# EAGLE board tester+adapter (EAGLE 6.4)
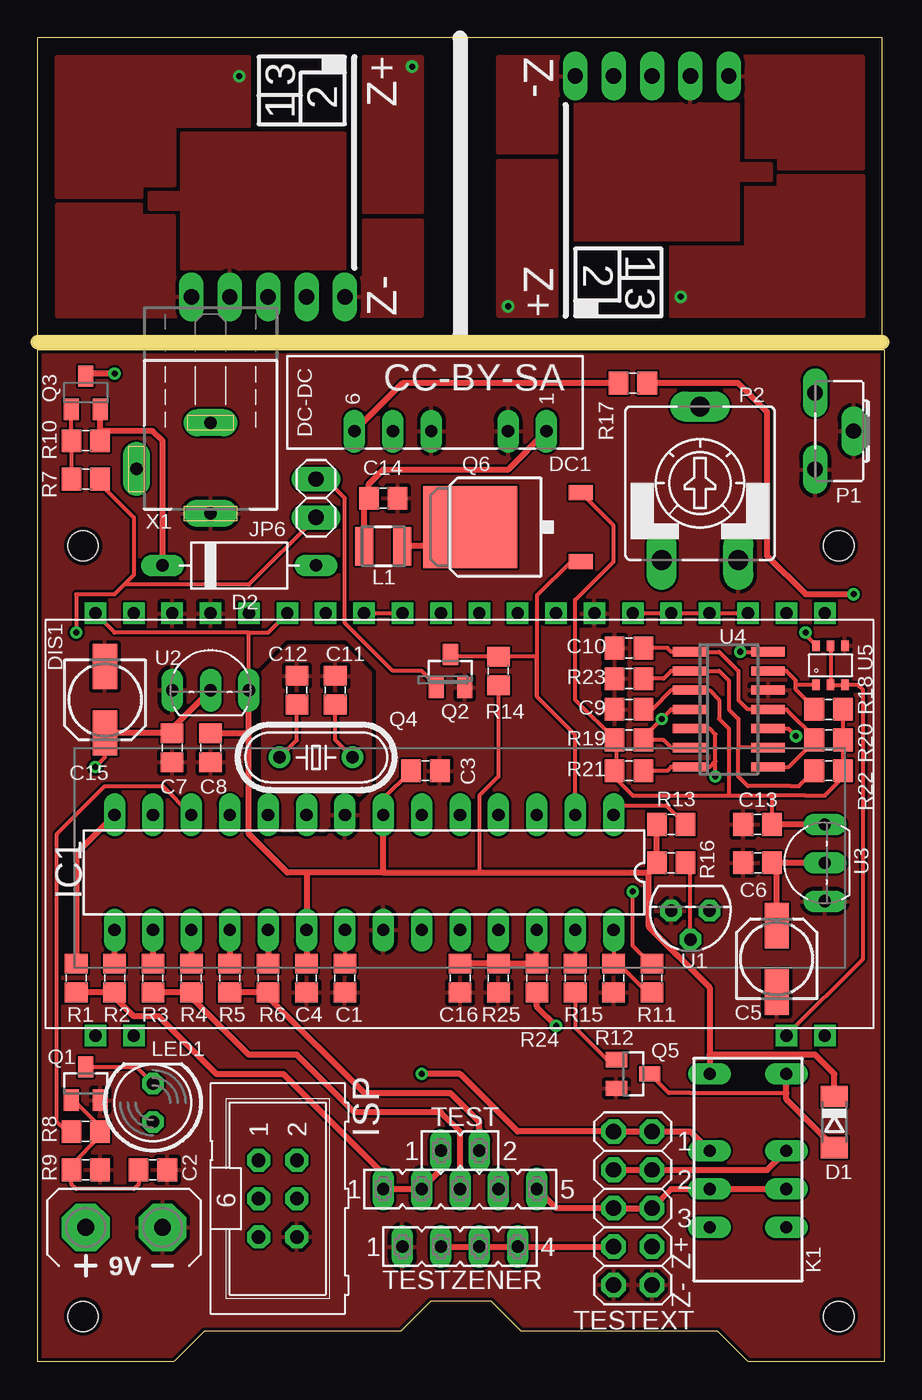
[diagram p0: board, top side]
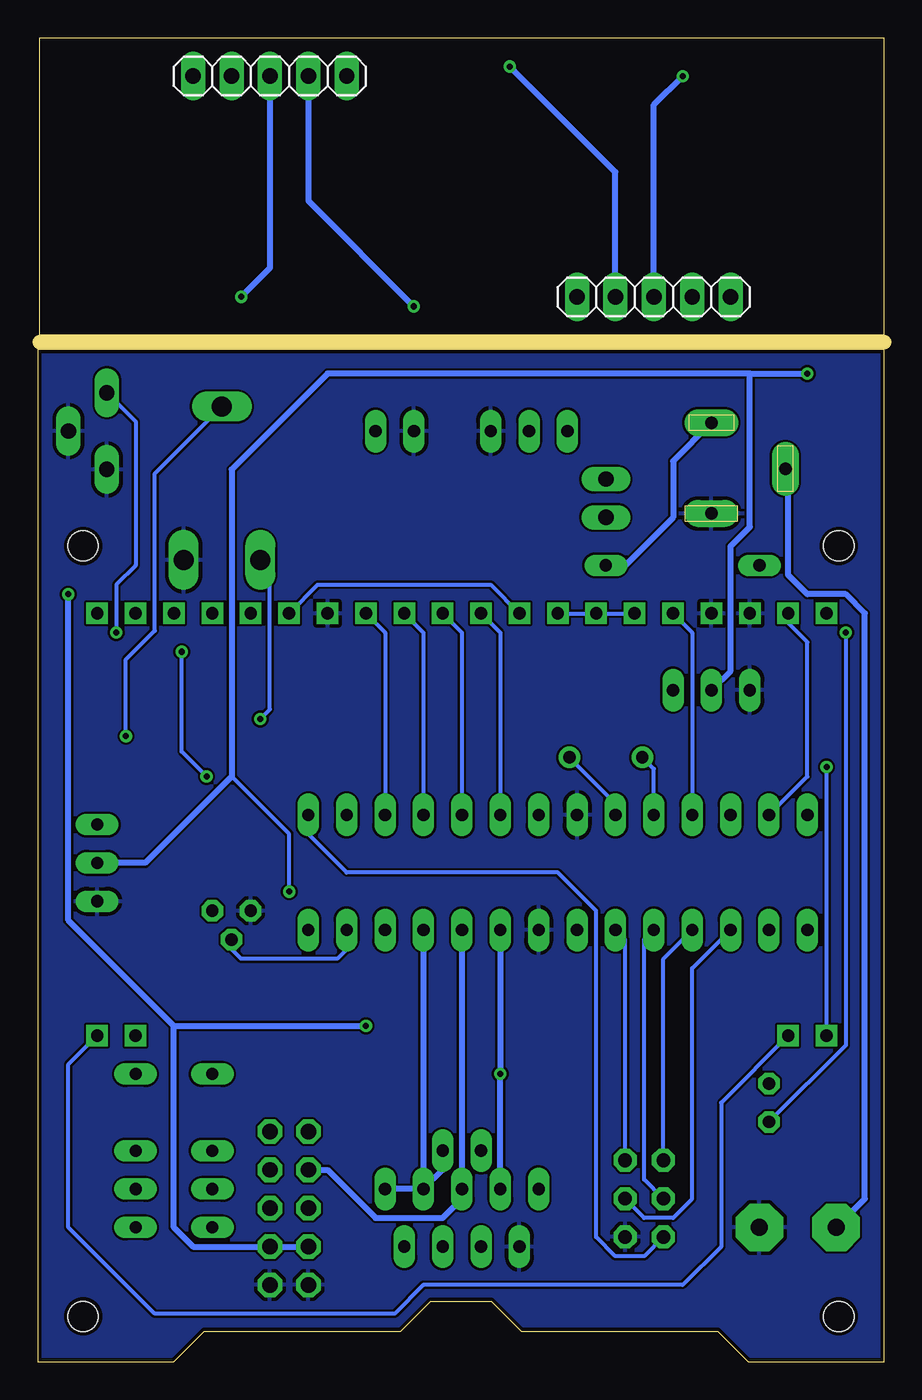
[diagram p1: board, bottom side, seen from below]

Size 56 x 87.63 mm. Coordinates in mm from the lower left corner, seen from the top.
Outline: 0,67.94 0,87.63 55.88,87.63 55.88,67.94 0,67.94
Copper layers (1*16): Top 0.035mm / dielectric 1.5mm / Bottom 0.035mm
Design rules "DFRobot_Eagle_Rule_v0.4 *": minimum track width 6mil, minimum drill 12mil, track to track 6mil, track to pad 6mil, pad to pad 6mil, via to via 6mil, smd to smd 0mil, copper to edge 10mil, drill to drill 10mil, minimum pad ring 12mil, minimum via ring 8mil, stop-mask expansion 2mil, vias tented up to drill 0mil, thermal gap 10mil
Net classes: 0 default: width 0.25 mm, drill 0.3 mm
tRestrict: area 52.8,46.9 to 53.1,47.7; area 51.8,47.8 to 53.2,47.9; area 50.7,44.3 to 54.4,44.4; area 51.1,45.2 to 52.2,45.3; area 52.7,45.2 to 53.9,45.3; 9 lines
Milling: 1 lines

## Footprints (pad centres in the part's own frame; a part is rotated, then mirrored left to right if it is on the bottom)
C0805 = smd 1.3 x 1.5: 1 -0.95,0; 2 0.95,0
153CLV-0505 = smd 3 x 1.6: + 2.2,0; - -2.2,0
SOD80C = smd 1.4 x 1.8: A 1.7,0; C -1.7,0
DIODE-3-10 = drill 0.813 long: A 5.08,0; C -5.08,0
NMA = drill 0.813 long: 1 0,6.35; 2 0,3.81; 4 0,-1.27; 5 0,-3.81; 6 0,-6.35
EA_DOGM = drill 0.813 square: 1 0,0; 2 2.54,0; 19 45.72,0; 20 48.26,0; 21 48.26,27.94; 22 45.72,27.94; 23 43.18,27.94; 24 40.64,27.94; 25 38.1,27.94; 26 35.56,27.94; 27 33.02,27.94; 28 30.48,27.94; 29 27.94,27.94; 30 25.4,27.94; 31 22.86,27.94; 32 20.32,27.94; 33 17.78,27.94; 34 15.24,27.94; 35 12.7,27.94; 36 10.16,27.94; 37 7.62,27.94; 38 5.08,27.94; 39 2.54,27.94; 40 0,27.94
AB9V = drill 1.118 pad 3.15 octagon: + 0,2.54; - 0,-2.54
DIL28-3 = drill 0.813 long: 1 -16.51,-3.81; 2 -13.97,-3.81; 3 -11.43,-3.81; 4 -8.89,-3.81; 5 -6.35,-3.81; 6 -3.81,-3.81; 7 -1.27,-3.81; 8 1.27,-3.81; 9 3.81,-3.81; 10 6.35,-3.81; 11 8.89,-3.81; 12 11.43,-3.81; 13 13.97,-3.81; 14 16.51,-3.81; 15 16.51,3.81; 16 13.97,3.81; 17 11.43,3.81; 18 8.89,3.81; 19 6.35,3.81; 20 3.81,3.81; 21 1.27,3.81; 22 -1.27,3.81; 23 -3.81,3.81; 24 -6.35,3.81; 25 -8.89,3.81; 26 -11.43,3.81; 27 -13.97,3.81; 28 -16.51,3.81
ML6 = drill 0.914 octagon: 1 -2.54,-1.27; 2 -2.54,1.27; 3 0,-1.27; 4 0,1.27; 5 2.54,-1.27; 6 2.54,1.27
FE05-1 = drill 0.813 long: 1 -5.08,0; 2 -2.54,0; 3 0,0; 4 2.54,0; 5 5.08,0
FE04-1 = drill 0.813 long: 1 -3.81,0; 2 -1.27,0; 3 1.27,0; 4 3.81,0
2X05 = drill 1.016 octagon: 1 -5.08,-1.27; 2 -5.08,1.27; 3 -2.54,-1.27; 4 -2.54,1.27; 5 0,-1.27; 6 0,1.27; 7 2.54,-1.27; 8 2.54,1.27; 9 5.08,-1.27; 10 5.08,1.27
1X05 = drill 1.016 long: 1 -5.08,0; 2 -2.54,0; 3 0,0; 4 2.54,0; 5 5.08,0
1X02 = drill 1.016 long: 1 -1.27,0; 2 1.27,0
FE02-1 = drill 0.813 long: 1 -1.27,0; 2 1.27,0
NA = drill 0.8 long: 1 -6.35,-2.54; 3 -1.27,-2.54; 4 1.27,-2.54; 5 3.81,-2.54; 8 3.81,2.54; 9 1.27,2.54; 10 -1.27,2.54; 12 -6.35,2.54
SM-NE29 = smd 1.2 x 2.54: 1 -1.25,0; 2 1.25,0
LED5MM = drill 0.813 octagon: A -1.27,0; K 1.27,0
SP6000C-180 = hole 2: 3,54; 53,54; 3,3; 53,3
CA6H = drill 1.016 long: A -2.54,0; E 2.54,0; S 0,2.54
CA9V = drill 1.321 long: A -2.54,-5.08; E 2.54,-5.08; S 0,5.08
SOT23 = smd 1 x 1.4: 1 -0.95,-1.1; 2 0.95,-1.1; 3 0,1.1
SOT23-BEC = smd 1 x 1.4: B -0.95,-1.1; C 0,1.1; E 0.95,-1.1
HC49/S = drill 0.813: 1 -2.413,0; 2 2.413,0
D-PAK_TO252AA = smd 1 x 1.6: 1 -2.28,-4.8; 3 2.28,-4.8 | smd 5.4 x 6.2: 4 0,2.5
R0805 = smd 1.3 x 1.5: 1 -0.95,0; 2 0.95,0
TO92 = drill 0.813 octagon: 1 1.27,0; 2 0,1.905; 3 -1.27,0
TO92-LOWDROP = drill 0.813 long: GND -3.81,0; IN -1.27,0; OUT 1.27,0
SO14 = smd 0.6 x 2.2: 1 -3.81,-2.6; 2 -2.54,-2.6; 3 -1.27,-2.6; 4 0,-2.6; 5 1.27,-2.6; 6 2.54,-2.6; 7 3.81,-2.6; 8 3.81,2.6; 9 2.54,2.6; 10 1.27,2.6; 11 0,2.6; 12 -1.27,2.6; 13 -2.54,2.6; 14 -3.81,2.6
SC74_INFINEON = smd 0.5 x 0.7: 1 -0.95,-1.3; 2 0,-1.3; 3 0.95,-1.3; 4 0.95,1.3; 5 0,1.3; 6 -0.95,1.3
NEB21R_SHORT = drill 0.813 pad 1.778 long: 1 0,7.35; 2 4.9,4.4; 3 0,1.35

## Placement (x,y rotation side)
C1  1n  [C0805]  20.32,25.4 90 top
C2  10n  [C0805]  7.62,12.7 0 top
C3  100n  [C0805]  25.65,39.12 180 top
C4  100n  [C0805]  17.78,25.4 270 top
C5  47u  [153CLV-0505]  48.9,26.67 90 top
C6  1u  [C0805]  47.62,33.02 180 top
C7  1u  [C0805]  8.89,40.64 270 top
C8  1u  [C0805]  11.43,40.64 270 top
C9  100n  [C0805]  39.12,43.18 180 top
C10  100n  [C0805]  39.12,47.24 180 top
C11  22p  [C0805]  19.68,44.45 270 top
C12  22p  [C0805]  17.14,44.45 270 top
C13  1u  [C0805]  47.62,35.56 180 top
C14  1u  [C0805]  22.86,57.15 0 top
C15  47u  [153CLV-0505]  4.45,43.81 270 top
C16  10n  [C0805]  27.94,25.4 270 top
D1  BAV 103  [SOD80C]  52.7,15.88 270 top
D2  SB130  [DIODE-3-10]  13.34,52.7 0 top
DC1  5V/+-15V  [NMA]  27.3,61.59 270 top
DIS1  EA-DOG-M162  [EA_DOGM]  3.81,21.59 0 top
G1  AB9V  [AB9V]  5.71,8.89 90 top
IC1  ATmega8/88/168  [DIL28-3]  21.59,32.38 180 top
JP1  ISP  [ML6]  15.88,10.79 270 top
JP2  TEST  [FE05-1]  27.94,11.43 0 top
JP3  TESTZENER  [FE04-1]  27.94,7.62 0 top
JP4  TESTEXT  [2X05]  39.37,10.16 270 top
JP5  TESTSMD  [1X05]  15.24,70.48 180 bottom
JP6  POWERSW  [1X02]  18.41,57.15 270 top
JP7  TEST2  [FE02-1]  27.94,13.97 0 top
JP8  TESTSMD  [1X05]  40.64,85.09 0 bottom
K1  NA 05W K  [NA]  46.99,12.7 270 top
L1  33u  [SM-NE29]  22.86,53.98 180 top
LED1  POWER  [LED5MM]  7.62,17.14 90 top
M1  SP6000C-180  [SP6000C-180]  0,0 0 top
P1  250  [CA6H]  51.44,61.59 270 top
P2  10k lin  [CA9V]  43.81,58.15 0 top
Q1  BC847CSMD  [SOT23]  3.17,18.41 0 top
Q2  BC847CSMD  [SOT23]  27.3,45.72 0 top
Q3  BC807-40SMD  [SOT23-BEC]  3.17,64.14 0 top
Q4  8,000 MHz  [HC49/S]  18.41,40.01 0 top
Q5  BC847CSMD  [SOT23]  39.39,19.04 270 top
Q6  IRFR9024  [D-PAK_TO252AA]  31.11,55.24 90 top
R1  680  [R0805]  2.54,25.4 270 top
R2  470k  [R0805]  5.08,25.4 270 top
R3  680  [R0805]  7.62,25.4 270 top
R4  470k  [R0805]  10.16,25.4 270 top
R5  680  [R0805]  12.7,25.4 270 top
R6  470k  [R0805]  15.24,25.4 270 top
R7  3k3  [R0805]  3.17,58.42 180 top
R8  27k  [R0805]  3.17,15.24 0 top
R9  100k  [R0805]  3.17,12.7 180 top
R10  33k  [R0805]  3.17,60.96 180 top
R11  10k  [R0805]  40.64,25.4 270 top
R12  3k3  [R0805]  38.1,25.4 90 top
R13  10k  [R0805]  41.91,35.56 0 top
R14  27k  [R0805]  30.48,45.72 270 top
R15  4k7  [R0805]  35.56,25.4 270 top
R16  2k2  [R0805]  41.91,33.02 180 top
R17  10k  [R0805]  39.37,64.77 0 top
R18  3k3  [R0805]  52.32,43.18 0 top
R19  10k  [R0805]  39.12,41.15 180 top
R20  100k  [R0805]  52.32,41.15 0 top
R21  10k  [R0805]  39.12,39.12 180 top
R22  12k  [R0805]  52.32,39.12 0 top
R23  10k  [R0805]  39.12,45.21 0 top
R24  180k  [R0805]  33.02,25.4 270 top
R25  20k  [R0805]  30.48,25.4 90 top
U1  LT1004CZ-2.5  [TO92]  43.18,29.84 180 top
U2  MCP1702-5002  [TO92-LOWDROP]  12.7,44.45 0 top
U3  MCP1702-5002  [TO92-LOWDROP]  52.07,34.29 90 top
U4  LM339D  [SO14]  45.72,43.18 270 top
U5  BCR421U  [SC74_INFINEON]  52.45,46.1 0 top
X1  NEB21R  [NEB21R_SHORT]  11.43,63.5 180 top

## Library data of the parts
C1-C16 = rcl
D1 = diode
D2 = markus
DC1 = dc-dc-converter; MF: C & D TECHNOLOGIES, INC; MPN: NMA0515SC; OC_FARNELL: 1021434; OC_NEWARK: 61K3064
DIS1 = ea
G1 = battery
IC1 = avr-7
JP1 = con-ml; OC_FARNELL: unknown; OC_NEWARK: unknown
JP2 = con-lsta; OC_FARNELL: unknown; OC_NEWARK: unknown
JP3 JP7 = con-lsta
JP4 = pinhead; REICHELT: AW 226/20
JP5 JP8 = pinhead; REICHELT: AW 122/xx
JP6 = pinhead
K1 = relay; OC_FARNELL: unknown; OC_NEWARK: unknown
L1 = inductor-neosid; OC_FARNELL: unknown; OC_NEWARK: unknown
LED1 = led; _EXTERNAL_: ext. package
M1 = strapubox
P1 P2 = pot
Q1 Q2 Q5 = transistor-npn
Q3 = transistor-pnp
Q4 = crystal; OC_FARNELL: 1667008; OC_NEWARK: unknown
Q6 = transistor-power
R1-R6 R24 R25 = resistor; TOLERANCE: 0.1%
R7-R23 = resistor
U1 = reference
U2 U3 = asko
U4 = linear
U5 = c-infineon_v2
X1 = con-lumberg; MPN: NEB 21 R; OC_FARNELL: 1217037; OC_NEWARK: 97K6458

## Nets
+5V: C3.2 C4.1 C8.1 D1.C DIS1.23 DIS1.24 DIS1.25 DIS1.26 DIS1.32 DIS1.33 DIS1.34 DIS1.35 DIS1.40 IC1.7 IC1.20 JP1.2 K1.1 R13.1 R14.2 R16.2 U2.OUT
+5V/2: C9.1 C13.1 Q6.3 R18.2 R19.2 R20.2 R21.2 R22.2 U3.OUT U4.3
+30V: JP3.2 JP3.3 JP3.4 JP4.7 JP4.8 R17.2 R24.2
AREF: C1.2 IC1.21
GND: C1.1 C2.2 C3.1 C4.2 C5.- C6.2 C7.2 C8.2 C9.2 C10.2 C11.1 C12.1 C13.2 C14.2 C15.- C16.2 DC1.2 DC1.4 DIS1.27 DIS1.37 DIS1.38 G1.- IC1.8 IC1.22 JP1.6 JP3.1 JP4.9 JP4.10 P1.E P1.S P2.E Q1.2 Q2.2 Q5.2 R9.1 R12.1 R23.1 R25.1 U1.1 U2.GND U3.GND U4.12 U5.4 X1.1
N$1: P1.A U5.6
N$2: DIS1.2 DIS1.20
N$3: JP6.1 Q2.1
N$4: R22.1 R23.2 U4.2 U4.9
N$5: D2.C Q3.E R10.1
N$6: C10.1 R20.1 U4.1 U4.8 U4.11
N$7: R21.1 U4.5 U4.7 U4.14
N$8: LED1.K Q1.3
N$9: G1.+ X1.2
N$10: DIS1.19 U5.2 U5.3 U5.5
N$11: D2.A X1.3
N$12: C11.2 IC1.9 Q4.2
N$13: C12.2 IC1.10 Q4.1
N$15: P2.A R19.1 U4.4 U4.6
N$16: P2.S U4.10
N$17: R18.1 U4.13 U5.1
N$18: D1.A K1.12 Q5.3
N$21: JP6.2 LED1.A R7.1
N$22: Q5.1 R15.2
N$24: L1.1 Q6.4
N$25: C14.1 DC1.1 L1.2
N$28: DC1.6 R17.1
N$33: Q3.B R7.2 R10.2
N$35: C2.1 Q1.1 R8.2 R9.2
PB0: IC1.14 R1.1
PB1: IC1.15 R2.1
PB2: IC1.16 R3.1
PB3: IC1.17 JP1.4 R4.1
PB4: IC1.18 JP1.1 R5.1
PB5: IC1.19 JP1.3 R6.1
PC0: IC1.23 JP2.1 JP2.2 JP4.1 JP4.2 JP7.1 K1.3 R1.2 R2.2
PC1: IC1.24 JP2.3 JP4.3 JP4.4 K1.10 R3.2 R4.2
PC2: IC1.25 JP2.4 JP2.5 JP4.5 JP4.6 JP7.2 K1.4 K1.9 R5.2 R6.2
PC3: C16.1 IC1.26 R24.1 R25.2
PC4: IC1.27 R15.1 R16.1 U1.2
PC5: IC1.28 R11.2 R12.2
PC6: IC1.1 JP1.5 R13.2
PD0: IC1.2 Q2.3 Q6.1 R14.1
PD1: DIS1.28 IC1.3
PD2: DIS1.29 IC1.4
PD3: DIS1.30 IC1.5
PD4: DIS1.31 IC1.6
PD5: DIS1.36 IC1.11
PD6: IC1.12 R8.1
PD7: DIS1.39 IC1.13
TEST1: JP5.1
TEST2: JP5.2
TEST3: JP5.3
TEST4: JP8.3
TEST5: JP8.2
TEST6: JP8.1
TESTZ+: JP5.4
TESTZ+1: JP8.4
TESTZ-: JP5.5
TESTZ-1: JP8.5
V+: C5.+ C6.1 C7.1 C15.+ DIS1.1 Q3.C R11.1 U2.IN U3.IN

## Tracks (layer width: path | path; a pad name or v marks a point on that pad's centre or on a via)
+5V
  Top 0.25: 40.42,32.38 40.42,32.48 R16.2
  Top 0.254: DIS1.23 DIS1.24 DIS1.25 DIS1.26 | DIS1.32 DIS1.33 | U2.OUT 13.97,48.26 | 13.97,48.26 5.08,48.26 DIS1.40 | 13.97,48.26 15.24,48.26 DIS1.35 | R14.2 30.48,38.73 29.21,37.47 29.21,32.38 | IC1.7 22.86,37.27 C3.2
  Top 0.406: 22.86,32.38 17.78,32.38 | 17.78,32.38 16.51,32.38 13.97,34.92 13.97,41.59 | 22.86,32.38 IC1.7 | 17.78,32.38 IC1.20 C4.1 | 44.45,20.32 44.45,24.77 40.42,28.79 40.42,32.38 29.21,32.38 22.86,32.38 | 44.45,20.32 K1.1 | D1.C 52.7,19.05 51.44,20.32 44.45,20.32 | R16.2 R13.1 | 13.97,41.59 U2.OUT | 13.97,41.59 C8.1
  Bottom 0.254: DIS1.32 26.04,51.44 37.47,51.44 DIS1.26 | DIS1.33 DIS1.34 DIS1.35 | JP1.2 17.14,27.94 IC1.20
+5V/2
  Top 0.25: 50.8,37.47 52.07,37.47 53.27,38.67 R22.2 | 38.27,41.11 38.27,39.22 R21.2 38.27,39.02 38.27,38.57
  Top 0.254: C9.1 40.64,43.18 41.91,44.45 U4.3 44.45,44.45 45.09,43.81 45.09,42.55 45.72,41.91 45.72,37.47 | R18.2 R20.2 R22.2 | 38.23,41.15 35.56,43.81 35.56,50.42 38.1,52.96 38.1,55.34 Q6.3 | 45.72,37.47 39.37,37.47 38.27,38.57 | 45.72,37.47 48.58,37.47 | 48.58,37.47 C13.1 | 50.8,37.47 48.58,37.47
  Top 0.406: R22.2 53.25,39.12 53.34,39.2 | R19.2 38.23,41.15 38.27,41.11 | U3.OUT C13.1
+30V  (via drill 0.4)
  Top 0.406: JP3.2 JP3.3 JP3.4 JP4.7 | v53.98,50.8 50.8,50.8 48.26,53.34 48.26,62.87 46.35,64.77 R17.2 | v34.29,22.23 33.02,23.5 R24.2
  Bottom 0.406: v53.98,50.8 53.98,29.21 46.99,22.23 | 46.99,22.23 46.99,8.89 45.72,7.62 JP4.8 JP4.7 | 46.99,22.23 v34.29,22.23
AREF
  Top 0.254: IC1.21 C1.2
GND
  pour Top (rank 2): -1.27,66.93 57.15,66.93 57.15,-1.27 -1.27,-1.27
  pour Bottom (rank 2): -2.54,66.93 58.42,66.93 58.42,-2.54 -2.54,-2.54
N$1  (via drill 0.4)
  Top 0.254: U5.6 51.47,47.37 51.44,47.37 | 51.44,47.34 U5.6 | v50.8,48.26 50.8,48.1 U5.6
  Bottom 0.254: P1.A 49.53,62.23 49.53,52.7 50.8,51.44 v50.8,48.26
N$2
  Bottom 0.254: DIS1.2 10.79,17.14 10.79,7.62 13.34,5.08 30.48,5.08 32.38,3.17 48.26,3.17 53.98,8.89 53.98,19.68 DIS1.20
N$3
  Top 0.254: JP6.1 19.05,58.42 20.32,57.15 20.32,48.9 23.5,45.72 25.4,45.72 26.36,44.77 Q2.1
N$4
  Top 0.25: 49.82,38.1 50.36,38.1 R22.1
  Top 0.254: 46.35,40.64 46.35,42.55 45.72,43.18 45.72,45.09 45.09,45.72 U4.2 41.91,45.72 41.4,45.21 R23.2 | U4.9 46.35,40.64 | 49.82,38.1 46.99,38.1 46.35,38.73 46.35,40.64
N$5
  Top 0.406: D2.C 8.26,60.96 7.62,61.59 4.12,61.59 | 3.81,60.96 R10.1 4.12,61.06 4.12,61.59 | 4.12,61.59 Q3.E
N$6
  Top 0.25: 49.7,39.37 51.37,41.05 R20.1 51.47,41.15 51.47,41.24
  Top 0.254: C10.1 41.66,47.24 41.91,46.99 U4.1 45.09,46.99 46.35,45.72 46.35,43.81 46.99,43.18 U4.11 49.53,43.18 51.47,41.24 | U4.8 49.7,39.37
N$7  (via drill 0.4)
  Top 0.254: 44.83,39.75 44.45,39.37 U4.7 41.91,39.37 41.66,39.12 R21.1 | 44.83,39.75 44.83,41.53 44.45,41.91 U4.5 | v46.48,46.99 U4.14 | v44.83,38.73 44.83,39.75
  Bottom 0.254: v46.48,46.99 46.48,40.39 v44.83,38.73
N$8
  Top 0.254: Q1.3 6.52,19.52 LED1.K
N$9
  Bottom 0.406: G1.+ 1.27,10.79 1.27,49.53 2.54,50.8 5.08,50.8 6.35,52.07 6.35,58.92 X1.2
N$10
  Top 0.254: U5.5 U5.2 U5.3 54.26,44.8 54.61,44.45 54.61,26.67 DIS1.19
N$11
  Bottom 0.406: D2.A 17.14,52.7 13.97,55.88 13.97,59.61 X1.3
N$12
  Top 0.254: Q4.2 19.68,41.15 C11.2
  Bottom 0.254: IC1.9 17.78,36.96 Q4.2
N$13
  Top 0.254: Q4.1 17.14,41.15 C12.2
  Bottom 0.254: IC1.10 15.24,39.24 Q4.1
N$15  (via drill 0.4)
  Top 0.25: R19.1 40.07,41.21 40.01,41.27
  Top 0.254: U4.4 41.91,43.18 v41.27,42.55 40.01,41.27 39.97,41.24 | U4.6 41.91,40.64 41.4,41.15 R19.1
  Bottom 0.254: v41.27,42.55 40.64,43.18 40.64,52.44 P2.A
N$16  (via drill 0.4)
  Top 0.254: U4.10 49.66,41.91 v50.16,41.4
  Bottom 0.254: v50.16,41.4 50.16,46.48 48.26,48.39 48.26,58.78 P2.S
N$17
  Top 0.25: 50.16,44.49 51.37,43.28 R18.1
  Top 0.254: 50.16,44.49 50.16,44.8 | U4.13 49.53,45.72 50.16,45.09 50.16,44.8 | U5.1 50.16,44.8
N$18
  Top 0.25: 43.18,17.78 41.75,17.78 Q5.3
  Top 0.254: 43.18,17.78 49.53,17.78
  Top 0.406: D1.A 49.53,17.35 49.53,17.78 K1.12
N$21  (via drill 0.4)
  Top 0.25: 4.03,58.2 4.03,58.32 R7.1
  Top 0.254: v2.54,48.26 2.54,50.8 5.08,50.8 5.71,51.44 | 5.71,51.44 6.35,52.07 6.35,55.88 4.03,58.2 | JP6.2 13.97,51.44 5.71,51.44
  Bottom 0.254: v2.54,48.26 2.54,20.95 LED1.A
N$22
  Top 0.25: 35.56,22.1 37.67,19.99 Q5.1
  Top 0.254: R15.2 35.56,22.1
N$24
  Top 0.406: Q6.4 27.34,53.98 L1.1
N$25
  Top 0.406: DC1.1 31.11,59.05 22.86,59.05 21.91,58.1 C14.1 21.59,57.15 21.59,53.99 L1.2
N$28
  Top 0.406: R17.1 24.13,64.77 DC1.6
N$33
  Top 0.254: 2.33,62.94 Q3.B R10.2 R7.2
N$35
  Top 0.25: 2.54,11.43 2.23,11.74 R9.2 2.54,13.02 2.54,13.34 3.81,14.61 | 3.81,15.03 3.81,15.24 3.81,15.46
  Top 0.254: 3.81,15.24 R8.2 | Q1.1 2.23,17.04 2.65,17.04 3.81,15.88 3.81,15.46 | C2.1 6.67,11.75 6.35,11.43 2.54,11.43 | 3.81,14.61 3.81,15.03
PB0
  Top 0.406: IC1.14 2.54,33.66 R1.1
PB1
  Top 0.406: R2.1 IC1.15
PB2
  Top 0.406: IC1.16 R3.1
PB3
  Top 0.406: IC1.17 R4.1
  Bottom 0.254: JP1.4 15.88,9.53 13.97,9.53 12.7,10.79 12.7,26.04 IC1.17
PB4
  Top 0.406: IC1.18 R5.1
  Bottom 0.254: JP1.1 14.61,26.67 IC1.18
PB5
  Top 0.406: IC1.19 R6.1
  Bottom 0.254: JP1.3 15.88,12.06 15.88,27.94 IC1.19
PC0  (via drill 0.4)
  Top 0.406: K1.3 43.18,15.24 JP4.2 JP4.1 31.75,15.24 27.94,19.05 v25.4,19.05 | R1.2 R2.2 5.08,24.13 6.35,22.86 8,22.86 11.81,19.05 16.26,19.05 22.86,12.45 JP2.1 JP2.2 26.67,12.7 JP7.1
  Bottom 0.406: IC1.23 v25.4,19.05 JP2.2
PC1
  Top 0.406: R3.2 R4.2 10.16,24.13 13.97,20.32 17.14,20.32 20.95,16.51 26.67,16.51 27.94,15.24 JP2.3 | K1.10 48.26,12.7 JP4.4 JP4.3
  Bottom 0.406: IC1.24 JP2.3 27.94,10.79 29.21,9.53 33.66,9.53 36.83,12.7 JP4.3
PC2
  Top 0.406: R5.2 R6.2 15.24,24.13 21.59,17.78 27.3,17.78 29.21,15.88 JP7.2 | JP2.5 34.29,10.16 JP4.5 JP4.6 41.91,11.43 K1.4 K1.9
  Bottom 0.406: JP2.4 JP2.5 | IC1.25 JP2.4 | JP2.4 29.21,12.7 JP7.2
PC3
  Top 0.406: IC1.26 R24.1 R25.2 C16.1 28.04,26.25
PC4
  Top 0.25: 43.18,32.6 43.18,32.7 R16.1
  Top 0.254: IC1.27 R15.1 | U1.2 43.18,32.6
  Bottom 0.254: IC1.27 35.56,27.3 36.2,26.67 42.55,26.67 43.18,27.3 U1.2
PC5
  Top 0.25: 38.52,26.25 38.2,26.25 R12.2 | 40.22,24.55 40.54,24.55 R11.2
  Top 0.254: IC1.28 R12.2 | 38.52,26.25 40.22,24.55
PC6
  Top 0.254: IC1.1 38.73,36.83 41.59,36.83 R13.2
  Bottom 0.254: JP1.5 15.88,6.99 17.78,6.99 19.05,8.26 19.05,29.84 21.59,32.38 35.56,32.38 38.1,34.92 IC1.1
PD0
  Top 0.25: 33.02,44.03 33.02,46.67 R14.1 27.3,46.67 Q2.3
  Top 0.254: IC1.2 35.56,41.49 33.02,44.03 33.02,50.7 35.28,52.97 Q6.1 | 27.55,46.57 Q2.3
PD1
  Bottom 0.254: DIS1.28 33.02,48.26 IC1.3
PD2
  Bottom 0.254: DIS1.29 30.48,48.26 IC1.4
PD3
  Bottom 0.254: DIS1.30 27.94,48.26 IC1.5
PD4
  Bottom 0.254: DIS1.31 25.4,48.26 IC1.6
PD5
  Bottom 0.254: DIS1.36 12.7,48.26 IC1.11
PD6
  Top 0.254: IC1.12 8.26,38.1 4.45,38.1 1.27,34.92 1.27,15.88 1.91,15.24 R8.1
PD7
  Bottom 0.254: DIS1.39 6.35,48.9 5.08,47.62 5.08,38.73 IC1.13
TEST1
  pour Top: 10.79,69.22 10.79,71.75 9.02,71.75 9.02,75.82 6.86,75.82 6.86,76.58 1.27,76.58 1.27,69.22
TEST2
  pour Top: 12.06,69.22 13.34,69.22 13.34,72.39 20.32,72.39 20.32,81.28 9.53,81.28 9.53,77.34 7.37,77.34 7.37,76.33 9.53,76.33 9.53,72.39 12.06,72.39
TEST3  (via drill 0.4)
  Bottom 0.406: JP5.3 15.24,83.19 v13.34,85.09
  pour Top: 9.02,81.79 9.02,77.85 6.86,77.85 6.86,77.09 1.27,77.09 1.27,86.36 13.97,86.36 13.97,81.79
TEST4  (via drill 0.4)
  Bottom 0.406: JP8.3 40.64,72.39 v42.55,70.48
  pour Top: 46.86,73.79 46.86,77.72 49.02,77.72 49.02,78.49 54.61,78.49 54.61,69.22 41.91,69.22 41.91,73.79
TEST5
  pour Top: 43.81,86.36 42.55,86.36 42.55,83.19 35.56,83.19 35.56,74.3 46.35,74.3 46.35,78.23 48.51,78.23 48.51,79.25 46.35,79.25 46.35,83.19 43.81,83.19
TEST6
  pour Top: 45.09,86.36 45.09,83.82 46.86,83.82 46.86,79.76 49.02,79.76 49.02,78.99 54.61,78.99 54.61,86.36
TESTZ+  (via drill 0.4)
  Bottom 0.406: JP5.4 17.78,78.74 v24.77,85.72
  pour Top: 21.59,76.07 21.59,86.36 25.4,86.36 25.4,76.07
TESTZ+1  (via drill 0.4)
  Bottom 0.406: JP8.4 38.1,76.83 v31.11,69.85
  pour Top: 34.29,79.5 34.29,69.22 30.48,69.22 30.48,79.5
TESTZ-
  pour Top: 25.4,69.22 20.32,69.22 20.32,71.75 21.59,71.75 21.59,75.56 25.4,75.56
TESTZ-1
  pour Top: 30.48,86.36 35.56,86.36 35.56,83.82 34.29,83.82 34.29,80.01 30.48,80.01
V+  (via drill 0.4)
  Top 0.25: R11.1 40.54,26.35 39.37,27.52
  Top 0.254: 39.37,27.52 v39.37,31.11 | 4.45,40.64 4.45,40.85 5.08,41.49 | v3.81,39.37 4.45,40.01 C15.+
  Top 0.406: v5.08,65.41 3.35,65.41 Q3.C | 5.08,41.49 4.57,41.49 C15.+ 8.89,41.62 | U3.IN 48.9,33.02 | C5.+ 48.9,33.02 | 48.9,33.02 C6.1 | C7.1 8.89,41.62 | 8.89,41.62 8.89,41.91 U2.IN
  Bottom 0.254: DIS1.1 v3.81,39.37 | v39.37,31.11 39.37,34.92 43.18,38.73
  Bottom 0.406: U2.IN 10.16,45.72 10.16,53.98 8.89,55.24 8.89,65.41 | 8.89,65.41 36.83,65.41 43.18,59.05 43.18,38.73 48.9,33.02 U3.IN | 8.89,65.41 v5.08,65.41

## Text on the board
tPlace: CC-BY-SA
tNames: Z- | 3 | 2 | Z+ | 1 | Z+ | 2 | 1 | 3 | Z- | 1 | 2 | 3 | Z+ | Z-